# Allegro board HY_UART_DBUG_V10A.brd
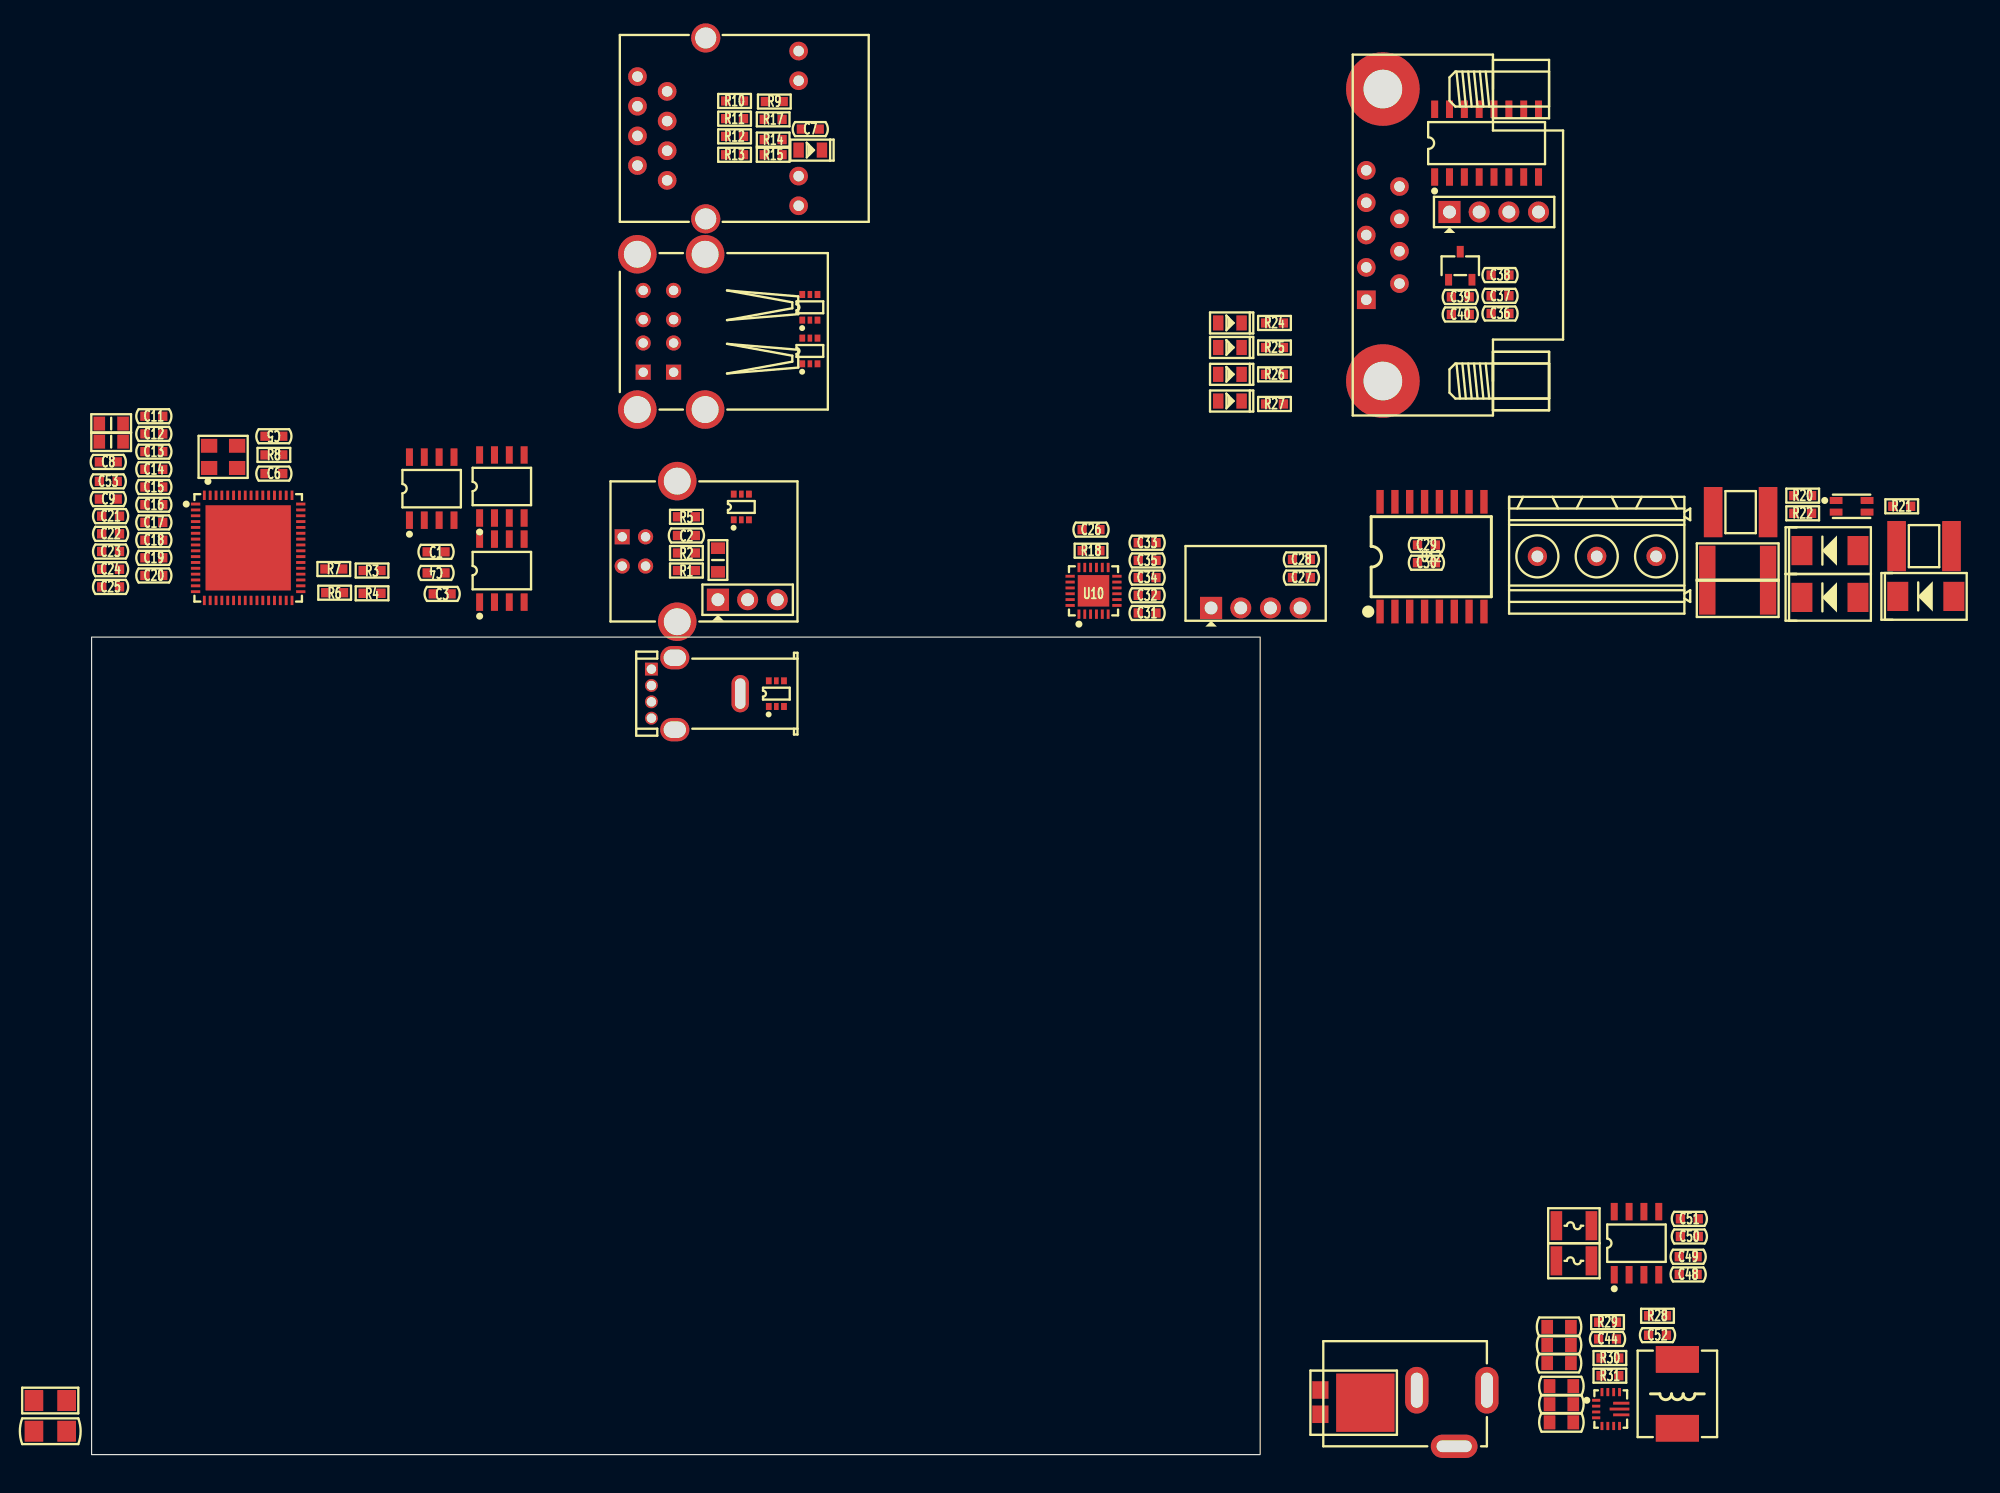
[diagram p0: board, top side]
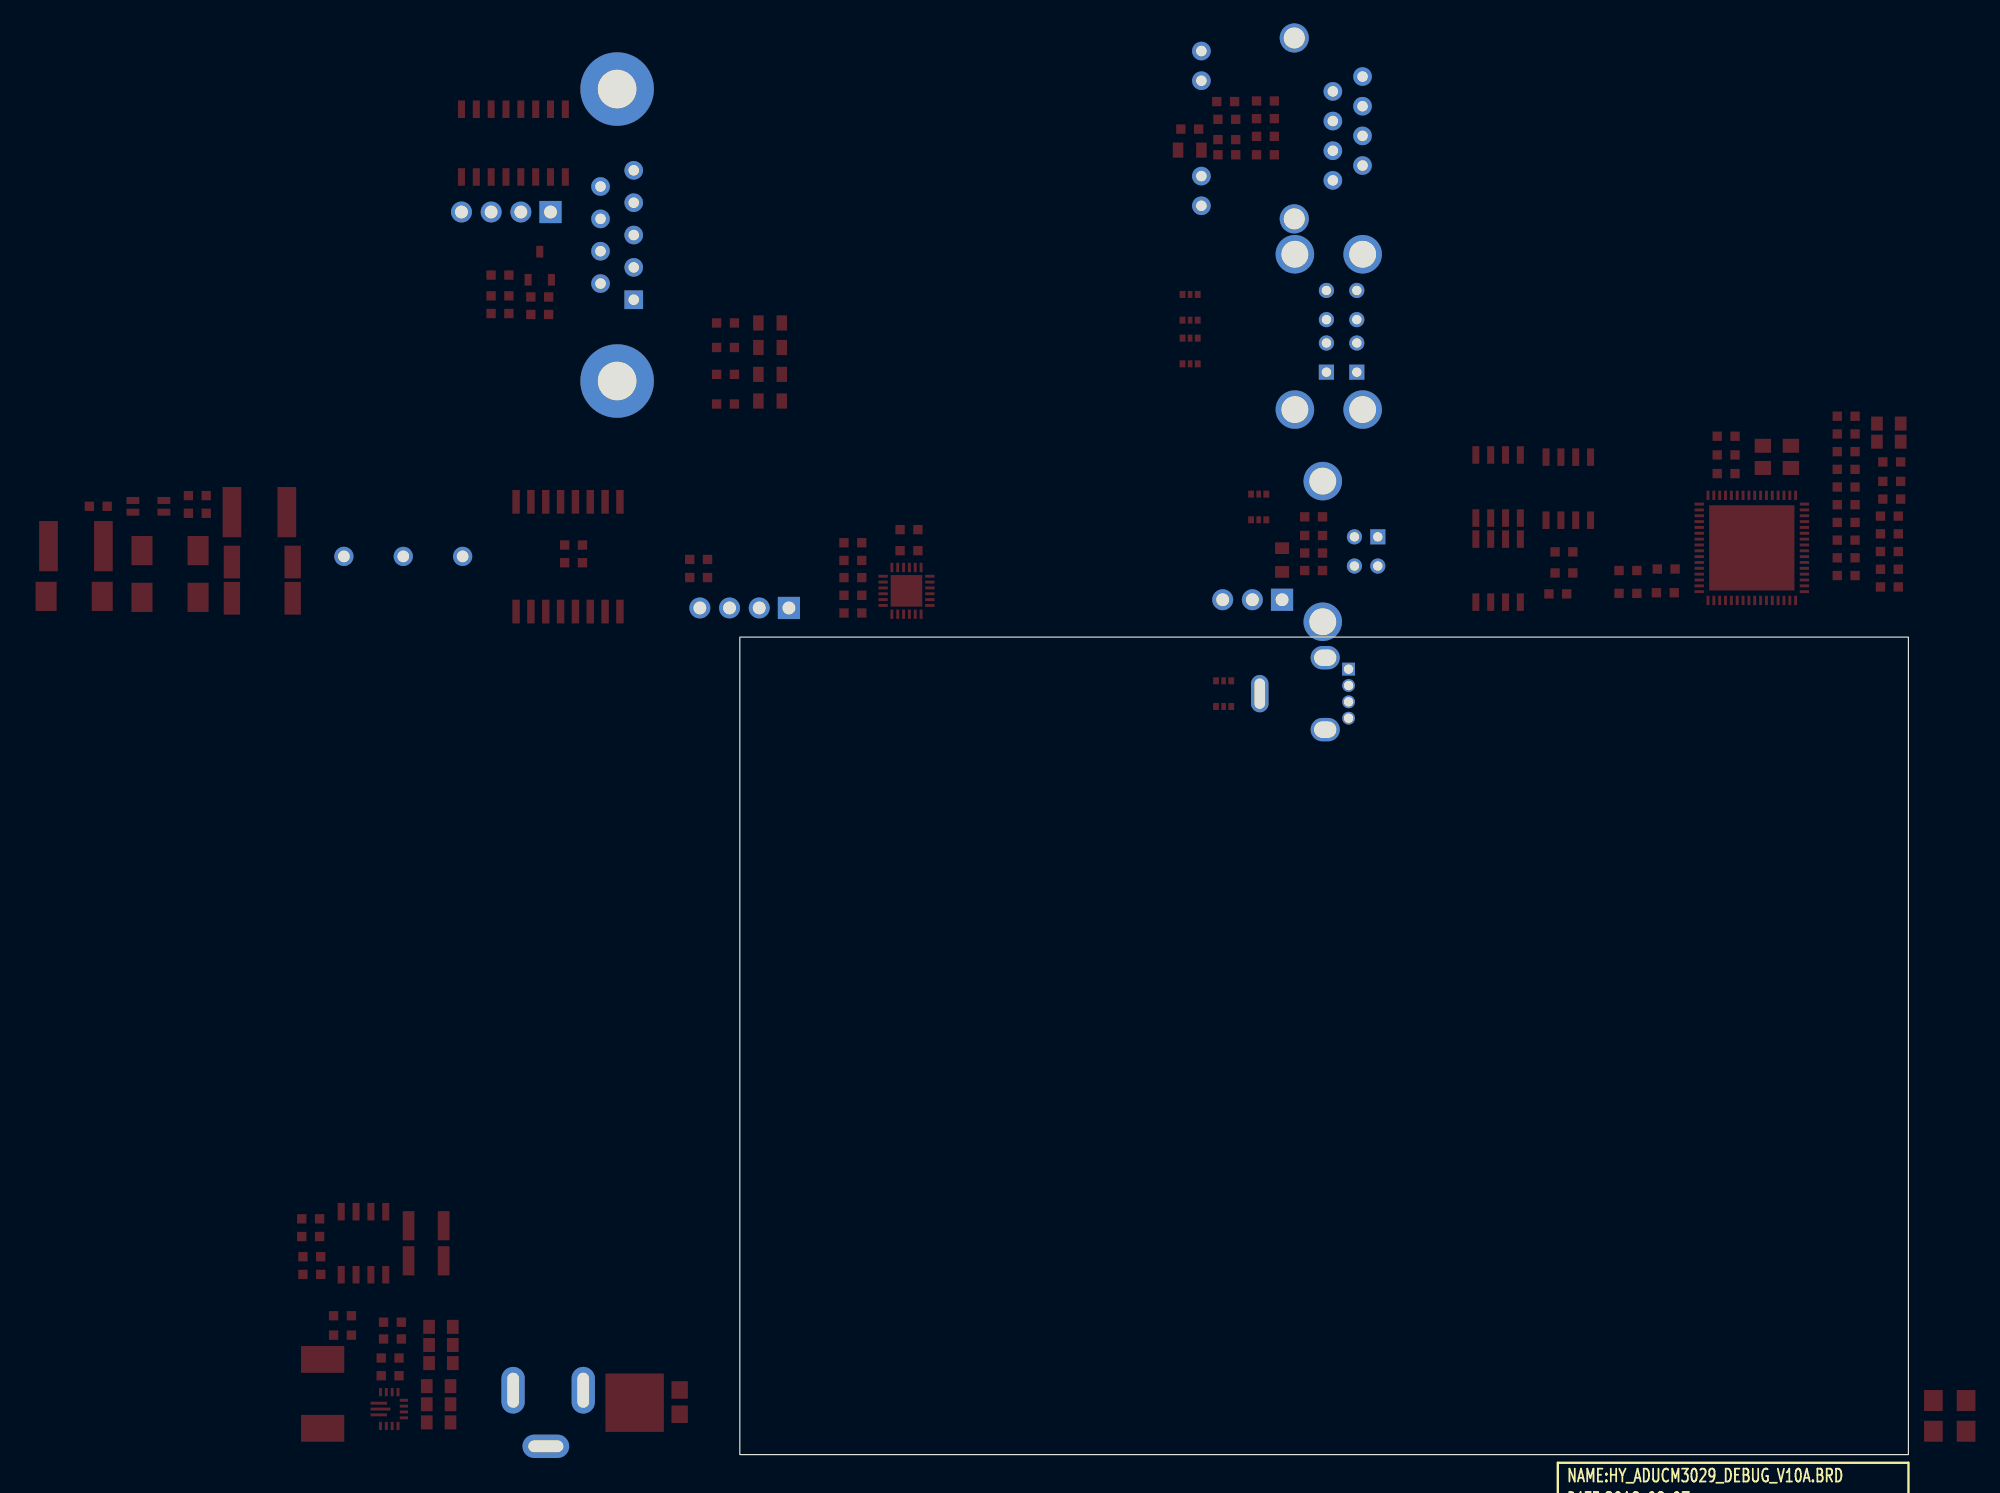
[diagram p1: board, bottom side, seen from below]

Outline 100 x 70 mm; copper layers: TOP, BOTTOM. Coordinates in mm from the lower left corner of the outline.
Outline path: rectangle 0,0 100,70

## Design rules (mm)
constraint set DEFAULT: min track width 0.203, pair gap 0.203
net group DP6: nets A B
net group ETH2_RX: nets RXN RXP
net group ETH2_TX: nets TXN TXP

## Placement (name value [footprint] x y rotation side)
C1  0.1uF_25V  [C0603]  29.48 77.3 0 top
C2  0.1uF_25V  [C0603]  50.9 78.7 0 top
C3  0.1uF_25V  [C0603]  30 73.7 180 top
C4  0.1uF_25V  [C0603]  29.48 75.49 180 top
C5  20pF_25V  [C0603]  15.6 87.2 180 top
C6  20pF_25V  [C0603]  15.6 84 180 top
C7  0.1uF_25V  [C0603]  61.5 113.5 180 top
C8  10uF_10V  [C0603]  1.43 85 180 top
C9  0.1uF_25V  [C0603]  1.43 81.82 0 top
C10  1nF_2000V  [C1206]  -3.54 2 0 top
C11  0.1uF_25V  [C0603]  5.33 88.91 0 top
C12  0.1uF_25V  [C0603]  5.33 87.4 0 top
C13  0.1uF_25V  [C0603]  5.33 85.88 0 top
C14  0.1uF_25V  [C0603]  5.33 84.37 0 top
C15  0.1uF_25V  [C0603]  5.33 82.85 0 top
C16  0.1uF_25V  [C0603]  5.33 81.34 0 top
C17  0.1uF_25V  [C0603]  5.33 79.82 0 top
C18  0.1uF_25V  [C0603]  5.33 78.3 0 top
C19  0.1uF_25V  [C0603]  5.33 76.79 0 top
C20  0.1uF_25V  [C0603]  5.33 75.27 0 top
C21  0.1uF_25V  [C0603]  1.63 80.36 0 top
C22  0.1uF_25V  [C0603]  1.63 78.84 0 top
C23  0.1uF_25V  [C0603]  1.63 77.33 0 top
C24  0.1uF_25V  [C0603]  1.63 75.81 0 top
C25  0.1uF_25V  [C0603]  1.63 74.3 0 top
C26  4.7uF_25V  [C0603]  85.52 79.2 0 top
C27  10uF_10V  [C0603]  103.52 75.1 0 top
C28  10uF_10V  [C0603]  103.52 76.65 0 top
C29  0.1uF_25V  [C0603]  114.22 77.88 0 top
C30  0.1uF_25V  [C0603]  114.22 76.37 0 top
C31  10uF_10V  [C0603]  90.32 72.06 0 top
C32  10uF_10V  [C0603]  90.32 73.58 0 top
C33  0.1uF_25V  [C0603]  90.33 78.08 0 top
C34  10uF_10V  [C0603]  90.32 75.1 0 top
C35  0.1uF_25V  [C0603]  90.33 76.57 0 top
C36  0.1uF_50V  [C0603]  120.52 97.71 0 top
C37  0.1uF_50V  [C0603]  120.52 99.22 0 top
C38  0.1uF_50V  [C0603]  120.52 101 0 top
C39  0.1uF_50V  [C0603]  117.12 99.13 0 top
C40  0.1uF_50V  [C0603]  117.12 97.63 0 top
C41  10uF_25V  [C0805]  125.58 9.38 0 top
C42  10uF_25V  [C0805]  125.58 7.83 0 top
C43  10uF_25V  [C0805]  125.58 10.94 0 top
C44  10uF_10V  [C0603]  129.72 9.9 0 top
C45  22uF_10V  [C0805]  125.78 5.86 0 top
C46  22uF_10V  [C0805]  125.78 2.76 0 top
C47  22uF_10V  [C0805]  125.78 4.31 0 top
C48  10uF_10V  [C0603]  136.62 15.43 0 top
C49  10uF_10V  [C0603]  136.62 16.94 0 top
C50  10uF_10V  [C0603]  136.72 18.67 0 top
C51  10uF_10V  [C0603]  136.72 20.19 0 top
C52  0.1uF_25V  [C0603]  134 10.23 0 top
C53  0.1uF_25V  [C0603]  1.43 83.33 0 top
D1  LED_GREEN  [LED0805]  61.5 111.7 0 top
D2  SMBJ6.8CA  [DO-214AA]  156.96 73.49 0 top
D3  SMBJ6.8CA  [DO-214AA]  148.76 73.4 0 top
D4  SMBJ6.8CA  [DO-214AA]  148.76 77.41 0 top
D5  LED_RED  [LED0805]  97.41 92.5 0 top
D6  LED_GREEN  [LED0805]  97.41 96.9 0 top
D7  LED_RED  [LED0805]  97.41 90.21 0 top
D8  LED_GREEN  [LED0805]  97.41 94.8 0 top
D9  V10P10  [TO-227A]  109 4.49 270 top
DC1  -  [DC005]  113.4 5.51 0 top
F1  SMD1210-200/NI  [FUSE1210]  126.84 19.6 0 top
F2  SMD1210-200  [FUSE1210]  126.84 16.59 0 top
GDT1  4532-091-LF  [SMD4532]  156.81 77.79 0 top
GDT2  4532-091-LF  [SMD4532]  141.11 80.7 0 top
J1  -  [CN1X3-2P54-Z]  53.6 73.2 0 top
J2  -  [HR911105A]  55.6 113.56 0 top
J3  DB128L-5.08-3P  [DB128L-5R08-3P]  128.8 76.91 0 top
J4  -  [DB9-M]  110.5 104.43 270 top
J5  -  [CN1X4-2P54-Z]  116.2 106.4 0 top
L1  BLM21PG600  [L0805]  53.6 76.6 90 top
L2  BLM21PG600  [L0805]  1.68 88.28 0 top
L3  BLM21PG600  [L0805]  1.68 86.73 0 top
L4  DLW31SN222SQ2L  [WCM3216]  150.61 81.2 0 top
L5  MWSA0603-1R5MT  [L6030]  135.7 5.2 90 top
NOREF  -  []  0 0 0 top
NOREF#2  -  []  0 0 90 top
R1  1K  [R0603]  50.9 75.7 180 top
R2  61.9K  [R0603]  50.9 77.2 180 top
R3  12K  [R0603]  24 75.7 0 top
R4  12.4K  [R0603]  24 73.75 0 top
R5  39.2K  [R0603]  50.9 80.3 180 top
R6  10K  [R0603]  20.8 73.8 0 top
R7  10K  [R0603]  20.73 75.83 0 top
R8  1M  [R0603]  15.6 85.6 0 top
R9  49.9R  [R0603]  58.42 115.86 0 top
R10  49.9R  [R0603]  55.02 115.91 0 top
R11  49.9R  [R0603]  55.02 114.39 0 top
R12  49.9R  [R0603]  55.02 112.88 0 top
R13  510R  [R0603]  55.02 111.3 0 top
R14  10R  [R0603]  58.32 112.6 0 top
R15  510R  [R0603]  58.32 111.3 0 top
R16  10M  [R1206]  -3.54 4.63 0 top
R17  510R  [R0603]  58.32 114.33 0 top
R18  10K  [R0603]  85.52 77.4 0 top
R19  10R  [R2010]  140.86 76.42 0 top
R20  4.7K  [R0603]  146.42 82.12 0 top
R21  120R/NI  [R0603]  154.9 81.2 0 top
R22  4.7K  [R0603]  146.42 80.6 0 top
R23  10R  [R2010]  140.86 73.32 0 top
R24  10K  [R0603]  101.22 96.9 0 top
R25  10K  [R0603]  101.22 94.8 0 top
R26  10K  [R0603]  101.22 92.5 0 top
R27  10K  [R0603]  101.22 89.96 0 top
R28  10K  [R0603]  134 11.89 0 top
R29  100K  [R0603]  129.72 11.34 0 top
R30  680K  [R0603]  129.92 8.27 0 top
R31  130K  [R0603]  129.92 6.75 0 top
U1  MIC2026-1YM  [SOIC8]  29.1 82.71 0 top
U2  LAN9514I-JZX  [QFN64-9X9X0R5-7R3X7R3]  13.4 77.64 270 top
U3  MIC2026-1YM  [SOIC8]  35.11 75.69 0 top
U4  TPD4E1U06DCKR  [SOT363]  55.6 81.14 0 top
U5  TPD4E1U06DCKR  [SOT363]  61.47 94.5 0 top
U6  93LC66B-I/SN  [SOIC8]  35.11 82.9 0 top
U7  TPD4E1U06DCKR  [SOT363]  61.47 98.24 0 top
U8  TPD4E1U06DCKR  [SOT363]  58.6 65.16 0 top
U9  DSX321G-25M  [X-4P-3R2X2R5-SMD]  11.26 85.43 0 top
U10  CP2105  [QFN24-4X4X0R5-2R7X2R7]  85.74 73.96 0 top
U11  -  [B0505S-1WR3]  99.61 72.5 0 top
U12  ADM2483BRWZ-REEL  [SOIC-16_300]  114.7 76.88 0 top
U13  MAX3232ESE+  [SOIC16]  119.38 112.3 0 top
U14  PESD1CAN  [SOT23-3]  117.12 101.8 0 top
U15  TPS63070RNMR  [VQFN15-2R5X3R0X0R5]  130 3.9 0 top
U16  TPS76833QDR  [SOIC8]  132.2 18.1 0 top
USB1  -  [USB-B]  45.41 77.34 0 top
USB2  -  [USB-A-DOUBLE]  47.2 96.18 0 top
USB3  -  [USB-A-L]  47.91 65.16 0 top

## Library data of the parts
C1-C25 C31-C35 C41-C53 = CAP NP_2
C26-C30 C36-C40 = CAP NP
D1 D5-D8 = LED_4
D2-D4 = P6SMB_1
D9 = DIODE13_6
DC1 = DC005
F1 F2 = FUSE
GDT1 GDT2 = BA301N
J1 J3 = CONN RCPT 3
J2 = CON_RJ45_1X8_F_RA_0
J4 = DB9-F_0
J5 = CONN RCPT 4
L1-L3 L5 = IND_BEAD_0805_600OHM_1
L4 = 744822222_0
R1-R31 = R_Generic
U1 U3 = MIC2026-1YM
U2 = LAN9514I-JZX
U4 U5 U7 U8 = TPD4E1U06DBVR
U6 = 93LC66B-I/SN
U9 = TSX-3225
U10 = CP2105_9
U11 = B0505S-1WR2
U12 = ADM2483BRWZ-REEL
U13 = ADM202_0
U14 = PESD1CAN
U15 = TPS63070RNMR
U16 = TPS76833Q
USB1 = USB-B
USB2 = USB-A-DOUBLE
USB3 = USB-A_0

## Footprints (pads in the part's own frame, mm; a bottom-side part is the same pattern mirrored in y, then rotated)
B0505S-1WR3
  rect 1.9x1.9 hole 1.1: 1(-3.81,0)
  round 1.8 hole 1.1: 2(-1.27,0) 3(1.27,0) 4(3.81,0)
C0603
  rect 0.8x0.8 smd: 1(-0.762,0) 2(0.762,0)
C0805
  rect 1x1.2 smd: 1(-1.016,0) 2(1.016,0)
C1206
  rect 1.6x1.8 smd: 1(-1.4,0) 2(1.4,0)
CN1X3-2P54-Z
  rect 1.9x1.9 hole 1.1: 1(0,0)
  round 1.8 hole 1.1: 2(2.54,0) 3(5.08,0)
CN1X4-2P54-Z
  rect 1.9x1.9 hole 1.1: 1(0,0)
  round 1.8 hole 1.1: 2(2.54,0) 3(5.08,0) 4(7.62,0)
DB9-M
  rect 1.6x1.6 hole 0.9: 1(5.54,-1.42)
  round 1.6 hole 0.9: 2(2.77,-1.42) 3(0,-1.42) 4(-2.77,-1.42) 5(-5.54,-1.42) 6(4.155,1.42) 7(1.385,1.42) 8(-1.385,1.42) 9(-4.155,1.42)
  round 6.3 hole 3.3: 10(12.5,0) 11(-12.5,0)
DB128L-5R08-3P
  round 1.65 hole 1: 1(-5.08,0) 2(0,0) 3(5.08,0)
DC005
  oval 2x4 hole 1x3: 1(6,0) 2(0,0)
  oval 4x2 hole 3x1: 3(3.2,-4.8)
DO-214AA
  rect 1.8x2.5 smd: 1(2.4,0) 2(-2.4,0)
FUSE1210
  rect 1x2.5 smd: 1(-1.5,0) 2(1.5,0)
HR911105A
  round 1.6 hole 0.9: 1(-6.35,-4.45) 2(-8.89,-3.18) 3(-6.35,-1.91) 4(-8.89,-0.64) 5(-6.35,0.63) 6(-8.89,1.9) 7(-6.35,3.17) 8(-8.89,4.44) 9(4.9,-6.625) 10(4.9,-4.085) 11(4.9,4.085) 12(4.9,6.625)
  round 2.5 hole 1.8: 13(-3.05,-7.745) 14(-3.05,7.745)
L0805
  rect 1x1.2 smd: 1(-1.016,0) 2(1.016,0)
L6030
  rect 2.3x3.7 smd: 1(-2.95,0) 2(2.95,0)
LED0805
  rect 0.9x1.3 smd: 1(-1,0) 2(1,0)
QFN24-4X4X0R5-2R7X2R7
  rect 0.25x0.8 smd: 1(-1.25,-2) 2(-0.75,-2) 3(-0.25,-2) 4(0.25,-2) 5(0.75,-2) 6(1.25,-2) 13(1.25,2) 14(0.75,2) 15(0.25,2) 16(-0.25,2) 17(-0.75,2) 18(-1.25,2)
  rect 0.8x0.25 smd: 7(2,-1.25) 8(2,-0.75) 9(2,-0.25) 10(2,0.25) 11(2,0.75) 12(2,1.25) 19(-2,1.25) 20(-2,0.75) 21(-2,0.25) 22(-2,-0.25) 23(-2,-0.75) 24(-2,-1.25)
  rect 2.7x2.7 smd: 25(0,0)
QFN64-9X9X0R5-7R3X7R3
  rect 0.25x0.8 smd: 1(-3.75,-4.5) 2(-3.25,-4.5) 3(-2.75,-4.5) 4(-2.25,-4.5) 5(-1.75,-4.5) 6(-1.25,-4.5) 7(-0.75,-4.5) 8(-0.25,-4.5) 9(0.25,-4.5) 10(0.75,-4.5) 11(1.25,-4.5) 12(1.75,-4.5) 13(2.25,-4.5) 14(2.75,-4.5) 15(3.25,-4.5) 16(3.75,-4.5) 33(3.75,4.5) 34(3.25,4.5) 35(2.75,4.5) 36(2.25,4.5) 37(1.75,4.5) 38(1.25,4.5) 39(0.75,4.5) 40(0.25,4.5) 41(-0.25,4.5) 42(-0.75,4.5) 43(-1.25,4.5) 44(-1.75,4.5) 45(-2.25,4.5) 46(-2.75,4.5) 47(-3.25,4.5) 48(-3.75,4.5)
  rect 0.8x0.25 smd: 17(4.5,-3.75) 18(4.5,-3.25) 19(4.5,-2.75) 20(4.5,-2.25) 21(4.5,-1.75) 22(4.5,-1.25) 23(4.5,-0.75) 24(4.5,-0.25) 25(4.5,0.25) 26(4.5,0.75) 27(4.5,1.25) 28(4.5,1.75) 29(4.5,2.25) 30(4.5,2.75) 31(4.5,3.25) 32(4.5,3.75) 49(-4.5,3.75) 50(-4.5,3.25) 51(-4.5,2.75) 52(-4.5,2.25) 53(-4.5,1.75) 54(-4.5,1.25) 55(-4.5,0.75) 56(-4.5,0.25) 57(-4.5,-0.25) 58(-4.5,-0.75) 59(-4.5,-1.25) 60(-4.5,-1.75) 61(-4.5,-2.25) 62(-4.5,-2.75) 63(-4.5,-3.25) 64(-4.5,-3.75)
  rect 7.3x7.3 smd: 65(0,0)
R0603
  rect 0.8x0.8 smd: 1(-0.762,0) 2(0.762,0)
R1206
  rect 1.6x1.8 smd: 1(-1.4,0) 2(1.4,0)
R2010
  rect 1.4x2.8 smd: 1(-2.6,0) 2(2.6,0)
SMD4532
  rect 1.6x4.3 smd: 1(-2.349,0) 2(2.349,0)
SOIC8
  rect 0.6x1.5 smd: 1(-1.9,-2.7) 2(-0.63,-2.7) 3(0.64,-2.7) 4(1.91,-2.7) 5(1.91,2.7) 6(0.64,2.7) 7(-0.63,2.7) 8(-1.9,2.7)
SOIC16
  rect 0.6x1.5 smd: 1(-4.445,-2.9) 2(-3.175,-2.9) 3(-1.905,-2.9) 4(-0.635,-2.9) 5(0.635,-2.9) 6(1.905,-2.9) 7(3.175,-2.9) 8(4.445,-2.9) 9(4.445,2.9) 10(3.175,2.9) 11(1.905,2.9) 12(0.635,2.9) 13(-0.635,2.9) 14(-1.905,2.9) 15(-3.175,2.9) 16(-4.445,2.9)
SOIC-16_300
  rect 0.635x2.032 smd: 1(-4.445,-4.699) 2(-3.175,-4.699) 3(-1.905,-4.699) 4(-0.635,-4.699) 5(0.635,-4.699) 6(1.905,-4.699) 7(3.175,-4.699) 8(4.445,-4.699) 9(4.445,4.699) 10(3.175,4.699) 11(1.905,4.699) 12(0.635,4.699) 13(-0.635,4.699) 14(-1.905,4.699) 15(-3.175,4.699) 16(-4.445,4.699)
SOT23-3
  rect 0.6x1 smd: 1(-1,-1.2) 2(1,-1.2) 3(0,1.2)
SOT363
  rect 0.5x0.6 smd: 1(-0.65,-1.1) 3(0.65,-1.1) 4(0.65,1.1) 6(-0.65,1.1)
  rect 0.4x0.6 smd: 2(0,-1.1) 5(0,1.1)
TO-227A
  rect 1.5x1.4 smd: 1(1.04,-3.85) 2(-1.04,-3.85)
  rect 5x5 smd: 3(0.05,0)
USB-A-DOUBLE
  rect 1.3x1.3 hole 0.8: 1(2.6,-3.5) 5(0,-3.5)
  round 1.3 hole 0.8: 2(2.6,-1) 3(2.6,1) 4(2.6,3.5) 6(0,-1) 7(0,1) 8(0,3.5)
  round 3.3 hole 2.3: 9(-0.5,6.6) 10(5.3,6.6) 11(5.3,-6.7) 12(-0.5,-6.7)
USB-A-L
  rect 1.1x1.1 hole 0.8: 1(0,2.1)
  round 1.1 hole 0.8: 2(0,0.7) 3(0,-0.7) 4(0,-2.1)
  oval 2.5x2 hole 1.9x1.4: 5(2,-3.08) 6(2,3.08)
  oval 1.5x3.2 hole 0.9x2.6: 7(7.6,0)
USB-B
  rect 1.3x1.3 hole 0.8: 1(0,1.25)
  round 1.3 hole 0.8: 2(0,-1.25) 3(2,-1.25) 4(2,1.25)
  round 3.3 hole 2.3: 5(4.71,6.02) 6(4.71,-6.02)
VQFN15-2R5X3R0X0R5
  rect 0.7x0.25 smd: 1(-1.25,0.75) 2(-1.25,0.25) 3(-1.25,-0.25) 4(-1.25,-0.75)
  rect 0.25x0.7 smd: 5(-0.75,-1.45) 6(-0.25,-1.45) 7(0.25,-1.45) 8(0.75,-1.45) 12(0.75,1.45) 13(0.25,1.45) 14(-0.25,1.45) 15(-0.75,1.45)
  rect 1.4x0.25 smd: 9(0.9,-0.5) 11(0.9,0.5)
  rect 1.7x0.25 smd: 10(0.75,0)
WCM3216
  rect 1.1x0.6 smd: 1(-1.325,0.5) 2(-1.325,-0.5) 3(1.325,-0.5) 4(1.325,0.5)
X-4P-3R2X2R5-SMD
  rect 1.4x1.2 smd: 1(-1.2,-0.95) 2(1.2,-0.95) 3(1.2,0.95) 4(-1.2,0.95)

## Nets
GND: C1.2 C2.2 C3.2 C4.2 C5.1 C6.1 C7.2 C8.1 C9.1 C10.1 C11.1 C12.1 C13.1 C14.1 C15.1 C16.1 C17.1 C18.1 C19.1 C20.1 C21.1 C22.1 C23.1 C24.1 C25.1 C26.2 C27.1 C29.2 C31.1 C32.1 C33.1 C34.1 C35.1 C37.1 C39.1 C40.1 C41.1 C42.1 C43.1 C44.1 C45.1 C46.1 C47.1 C48.1 C49.1 C50.1 C51.1 C52.1 C53.1 D9.1 D9.2 DC1.2 DC1.3 J4.5 J5.1 R2.2 R3.2 R4.1 R16.2 R31.1 U1.6 U2.34 U2.44 U2.65 U3.6 U4.2 U4.5(NC) U5.2 U5.5(NC) U6.5(VSS) U7.2 U7.5(NC) U8.2 U8.5(NC) U9.2 U9.4 U10.2 U10.25 U11.1 U12.2 U12.8 U13.15 U14.3 U15.4 U15.6 U15.10 U15.15(VSEL) U16.1 U16.2 USB1.4 USB2.4 USB2.8 USB3.4
GND_EARTH: C10.2 J2.8 J2.13 J2.14 J4.10 J4.11 R16.1 USB1.5 USB1.6 USB2.9 USB2.10 USB2.11 USB2.12 USB3.5 USB3.6 USB3.7
GND_ISO: C28.1 C30.2 D2.1 D4.1 GDT1.2 GDT2.1 J3.2 R20.1 U11.3 U12.9 U12.15
VBUS_DET: J1.2 U2.11
VCC_3.3V: C4.1 C13.2 C14.2 C15.2 C16.2 C17.2 C29.1 C34.2 C35.2 C37.2 C50.2 C51.2 J2.9 J2.12 J5.2 L3.1 R1.2 R6.1 R7.2 R9.2 R10.2 R11.2 R12.2 R14.1 R17.2 R18.1 R24.2 R25.2 R26.2 R27.2 U2.19 U2.27 U2.28 U2.29 U2.30 U2.32 U2.33 U2.39 U2.40 U2.46 U6.8 U10.5(VIO) U10.6 U12.1 U13.16(VCC) U16.5 U16.6 U16.7(SENSE)
VCC_5V: C1.1 C3.1 C48.2 C49.2 F1.2 F2.2 U1.7 U3.7 U16.3 U16.4
VCC_5V_DC: C44.2 C45.2 C46.2 C47.2 F1.1 R29.2 R30.2 U15.7 U15.8
VCC_5V_ISO: C28.2 C30.1 R22.2 U11.4 U12.16(VDD2)
VCC_IN: C41.2 C42.2 C43.2 D9.3(CATHODE) DC1.1 R28.2 U15.12 U15.13
VCC_PWR2: U1.8 USB2.1
VCC_PWR3: U1.5(OUTB) USB2.5(VCC_2)
VCC_PWR4: C27.2 C31.2 C32.2 C33.2 U3.8 U11.2(VIN) USB3.1(VBUS)
VCC_PWR5: U3.5(OUTB) U10.7 U10.8
VCC_USB: F2.1 L1.1
VDD18CORE: C8.2 C9.2 C11.2 U2.15 U2.38
VDD18ETHPLL: C12.2 L2.2(B) U2.48
VDD18USBPLL: C53.2 L2.1 U2.62
VDD33A: C18.2 C19.2 C20.2 C21.2 C22.2 C23.2 C24.2 C25.2 L3.2(B) U2.5 U2.10 U2.49 U2.51 U2.54 U2.57 U2.64
A: GDT2.2 J3.3 R23.2
AUTOMDIX_EN: R6.2 U2.41
B: GDT1.1 J3.1 R19.2
EECLK: U2.23 U6.2
EECS: U2.24 U6.1
EEDI: U2.26 U6.3
EEDO: U2.25 U6.4
GPIO.0_ECI: D5.2(CATHODE) U10.15
GPIO.0_SCI: D7.2(CATHODE) U10.24
GPIO.1_ECI: D6.2(CATHODE) U10.14 U12.4 U12.5
GPIO.1_SCI: D8.2(CATHODE) U10.23
NFDX_LED_GPIO0: D1.2(CATHODE) U2.20
NLNKA_LED_GPIO1: R13.1 U2.21
NRESET: R7.1 U2.12
NSPD_LED_GPIO2: R15.1 U2.22
PRTCTL2: U1.1 U1.2 U2.14
PRTCTL3: U1.3 U1.4 U2.16
PRTCTL4: U2.17 U3.1 U3.2
PRTCTL5: U2.18 U3.3 U3.4
RS485_A: L4.3 R21.2 R22.1 U12.12
RS485_B: L4.4 R20.2 R21.1 U12.13
RXD_ECI: U10.12 U12.3
RXD_SCI: J5.4 U10.20 U13.12
RXN: J2.6 R12.1 U2.53
RXP: J2.3 R11.1 U2.52
TXD_ECI: U10.13 U12.6
TXD_SCI: J5.3 U10.21 U13.11
TXN: J2.2 R10.1 U2.56
TXP: J2.1(TXP1) R9.1 U2.55
USBDM0: U2.58 U4.1 U4.6 USB1.2
USBDM2: U2.1 U5.3 U5.4 USB2.2
USBDM3: U2.3 U7.1 U7.6 USB2.6
USBDM4: U2.6 U8.1 U8.6 USB3.2
USBDM5: U2.8 U10.4
USBDP0: U2.59 U4.3 U4.4 USB1.3
USBDP2: U2.2 U5.1 U5.6 USB2.3
USBDP3: U2.4 U7.3 U7.4 USB2.7
USBDP4: U2.7 U8.3 U8.4 USB3.3
USBDP5: U2.9 U10.3
XI: C6.2 R8.1 U2.61 U9.3(OUT2)
XO: C5.2 R8.2 U2.60(XO) U9.1
N17444119: D5.1 R24.1
N17444150: C26.1 U10.16
N17444179: D6.1 R25.1
N17444185: D7.1 R26.1
N17444187: D8.1 R27.1
N17444194: D3.2 D4.2 L4.2 R23.1
N17444207: D2.2 D3.1 L4.1 R19.1
N17444219: C36.2 U13.3
N17444221: C36.1 U13.1
N17444225: C40.2 U13.6
N17444229: C38.2 U13.5
N17444231: C38.1 U13.4
N17444237: J4.3 U13.13 U14.2
N17444239: J4.2 U13.14 U14.1
N17449852: R3.1 U2.63
N17450053: R4.2 U2.50
N17453472: L1.2(B) R5.1 USB1.1(VBUS)
N17453542: C2.1 J1.3 R2.1 R5.2
N17454488: J1.1 R1.1
N17458084: C7.1 J2.4 J2.5 R14.2
N17459440: J2.11 R15.2
N17459522: J2.10 R13.2
N17460830: D1.1 R17.1
N17461894: R18.2 U10.9
N17469844: R28.1 U15.1 U15.14
N17470263: C52.2 U15.3
N17470516: L5.2(B) U15.9
N17470525: L5.1 U15.11
N17471038: R29.1 U15.2
N17471980: R30.1 R31.2 U15.5
N174443348: C39.2 U13.2

Pads without a net: J2 7; J4 1 4 6 7 8 9; U2 13 31 35 36 37 42 43 45 47; U6 6 7; U10 1 10 11 17 18 19 22; U12 7 10 11 14; U13 7 8 9 10; U16 8

## Text on the board
Ref Des/Silkscreen Bottom: NAME:HY_ADUCM3029_DEBUG_V10A.BRD | DATE:2019_09_07
